# EAGLE board bc-cloony (EAGLE 7.7.0)
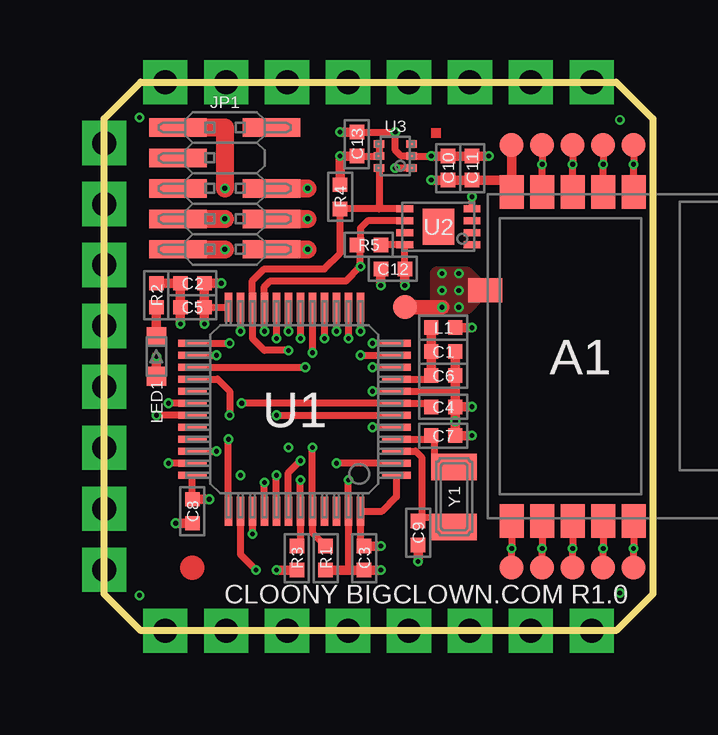
[diagram p0: board, top side]
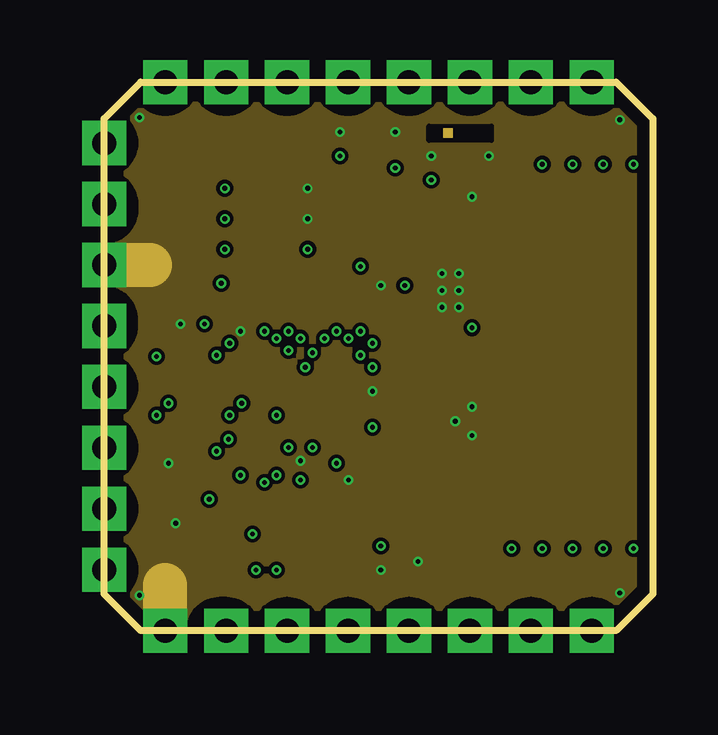
[diagram p1: board, inner layer Route2]
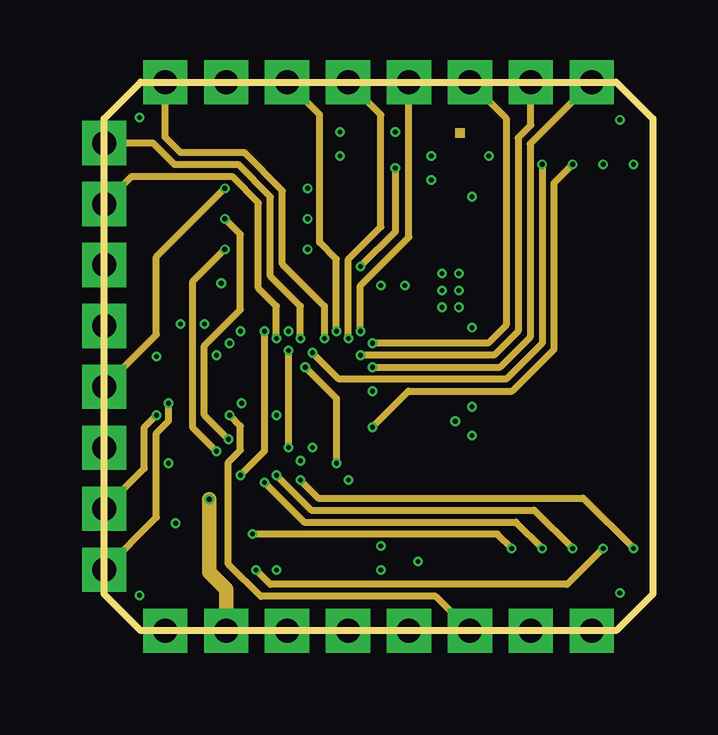
[diagram p2: board, inner layer Route3]
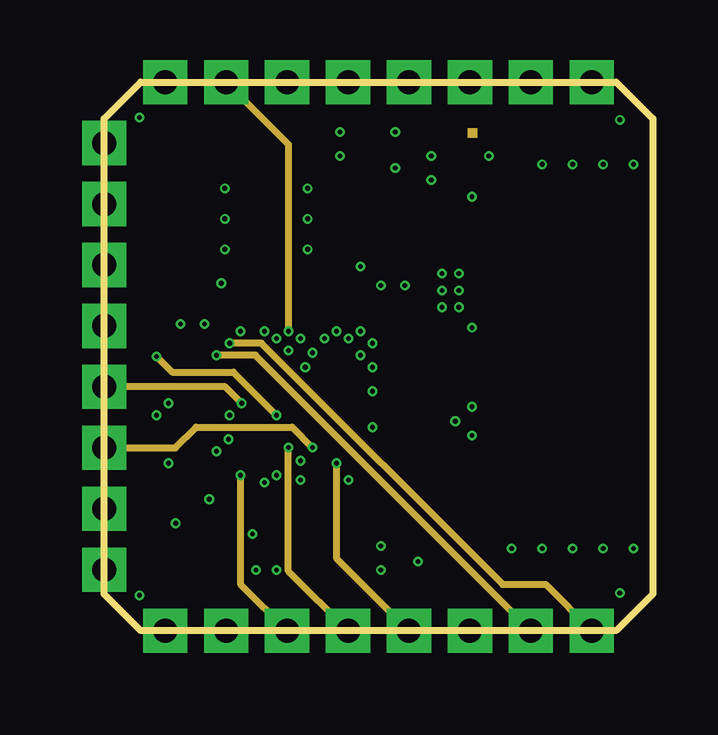
[diagram p3: board, inner layer Route14]
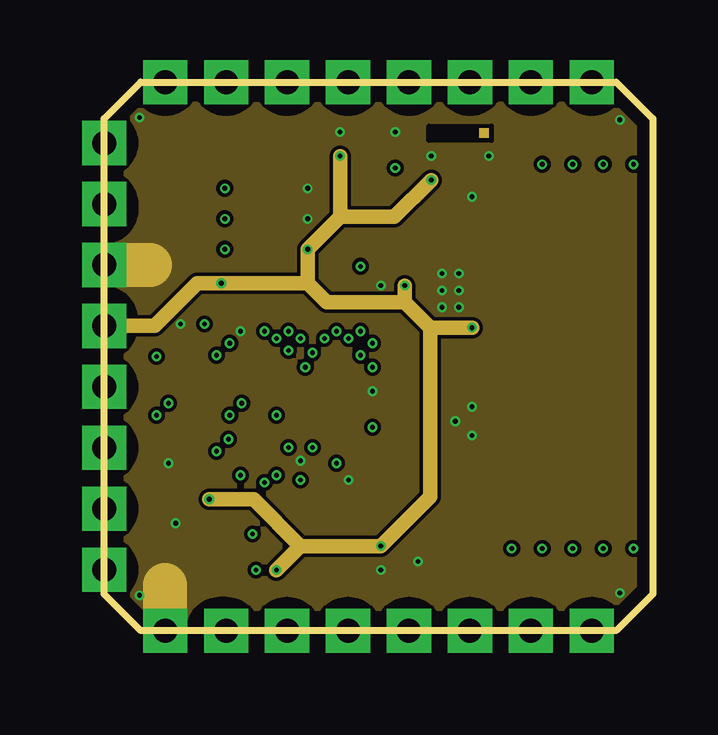
[diagram p4: board, inner layer Route15]

Size 22.86 x 22.86 mm. Coordinates in mm from the lower left corner, seen from the top.
Outline: 1.52,22.86 21.34,22.86 22.86,21.34 22.86,1.52 21.34,0 1.52,0 0,1.52 0,21.34 1.52,22.86
Copper layers [15:(1+2*3+14*15+16)]: Top 0.018mm / dielectric 0.1312mm / Route2 0.035mm / dielectric 0.25mm / Route3 0.035mm / dielectric 0.1182mm / Route14 0.035mm / dielectric 0.25mm / Route15 0.035mm / dielectric 0.1312mm / Bottom 0.018mm
Design rules "default *": minimum track width 0.3mm, minimum drill 0.2mm, track to track 0.15mm, track to pad 0.15mm, pad to pad 0.15mm, via to via 0.15mm, smd to smd 0.1mm, copper to edge 0mil, drill to drill 0.2mm, minimum pad ring 0mil, minimum via ring 0mil, stop-mask expansion 0.05mm, vias tented up to drill 0.3mm, thermal gap 0.3mm

## Footprints (pad centres in the part's own frame; a part is rotated, then mirrored left to right if it is on the bottom)
SPSGRF_R = smd 1.4 x 1: 1 -6.85,0.33; 2 -6.85,-0.94; 3 -6.85,-2.21; 4 -6.85,-3.48; 5 -6.85,-4.75; 7 6.85,-4.75; 8 6.85,-3.48; 9 6.85,-2.21; 10 6.85,-0.94; 11 6.85,0.33 | smd 1 x 1.4: 6 -2.75,-5.85
CAPACITOR-0402_R = smd 0.6 x 0.6: 1 -0.5,0; 2 0.5,0
BCH-P-SMT-1.27MM-2X5-E07 = smd 2.4 x 0.76: 1 -1.95,2.54; 2 1.95,2.54; 3 -1.95,1.27; 4 1.95,1.27; 5 -1.95,0; 6 1.95,0; 8 1.95,-1.27; 9 -1.95,-2.54; 10 1.95,-2.54
BC-HEADER-PIN-SQUARE-THT = drill 1 pad 1.84 square: 0 0,0
INDUCTOR-0402_R = smd 0.6 x 0.6: 1 -0.5,0; 2 0.5,0
KPT-1608LSURCK_R = smd 0.8 x 0.8: A -0.825,0; C 0.825,0
RESISTOR-0402_R = smd 0.6 x 0.6: 1 -0.5,0; 2 0.5,0
TP-1.0-MM = smd 1 x 1: 0 0,0
STM32L083CZT6_R = smd 1.2 x 0.3: 1 -4.25,2.75; 2 -4.25,2.25; 3 -4.25,1.75; 4 -4.25,1.25; 5 -4.25,0.75; 6 -4.25,0.25; 7 -4.25,-0.25; 8 -4.25,-0.75; 9 -4.25,-1.25; 10 -4.25,-1.75; 11 -4.25,-2.25; 12 -4.25,-2.75; 25 4.25,-2.75; 26 4.25,-2.25; 27 4.25,-1.75; 28 4.25,-1.25; 29 4.25,-0.75; 30 4.25,-0.25; 31 4.25,0.25; 32 4.25,0.75; 33 4.25,1.25; 34 4.25,1.75; 35 4.25,2.25; 36 4.25,2.75 | smd 0.3 x 1.2: 13 -2.75,-4.25; 14 -2.25,-4.25; 15 -1.75,-4.25; 16 -1.25,-4.25; 17 -0.75,-4.25; 18 -0.25,-4.25; 19 0.25,-4.25; 20 0.75,-4.25; 21 1.25,-4.25; 22 1.75,-4.25; 23 2.25,-4.25; 24 2.75,-4.25; 37 2.75,4.25; 38 2.25,4.25; 39 1.75,4.25; 40 1.25,4.25; 41 0.75,4.25; 42 0.25,4.25; 43 -0.25,4.25; 44 -0.75,4.25; 45 -1.25,4.25; 46 -1.75,4.25; 47 -2.25,4.25; 48 -2.75,4.25
ATSHA204A-MAHDA_R = smd 1.3 x 1.5: 0 0,0 | smd 0.7 x 0.3: 1 -1.4,0.75; 2 -1.4,0.25; 3 -1.4,-0.25; 4 -1.4,-0.75; 5 1.4,-0.75; 6 1.4,-0.25; 7 1.4,0.25; 8 1.4,0.75
TMP112AID_R = smd 0.45 x 0.3: 1 -0.675,0.5; 2 -0.675,0; 3 -0.675,-0.5; 4 0.675,-0.5; 5 0.675,0; 6 0.675,0.5
ABS07-32.768KHZ_R = smd 1.1 x 1.9: 1 -1.25,0; 2 1.25,0

## Placement (x,y rotation side)
A1  SPSGRF-868  [SPSGRF_R]  21.73,11.43 270 top
C1  1uF/10V  [CAPACITOR-0402_R]  14.13,11.63 0 top
C2  1uF/10V  [CAPACITOR-0402_R]  3.68,14.48 180 top
C3  100nF  [CAPACITOR-0402_R]  10.83,3.03 270 top
C4  100nF  [CAPACITOR-0402_R]  14.13,9.33 0 top
C5  100nF  [CAPACITOR-0402_R]  3.68,13.48 180 top
C6  100nF  [CAPACITOR-0402_R]  14.13,10.63 0 top
C7  18pF  [CAPACITOR-0402_R]  14.13,8.13 0 top
C8  100nF  [CAPACITOR-0402_R]  3.68,4.98 270 top
C9  18pF  [CAPACITOR-0402_R]  13.08,4.08 270 top
C10  4.7uF/10V  [CAPACITOR-0402_R]  14.33,19.28 90 top
C11  100nF  [CAPACITOR-0402_R]  15.33,19.28 90 top
C12  100nF  [CAPACITOR-0402_R]  12.03,15.08 180 top
C13  100nF  [CAPACITOR-0402_R]  10.53,20.28 90 top
FD1  FIDUCIAL  [FIDUCIAL-1MM]  3.68,2.63 0 top
FRAME1  FRAME-SCH/A4L-BRD/A4L  [FRAME-A4L]  11.43,11.43 0 top
JP1  BCH-P-SMT-1.27MM-2X5-E07  [BCH-P-SMT-1.27MM-2X5-E07]  5.03,18.43 180 top
JP2  BC-HEADER-PIN-SQUARE-THT  [BC-HEADER-PIN-SQUARE-THT]  20.32,22.86 0 top
JP3  BC-HEADER-PIN-SQUARE-THT  [BC-HEADER-PIN-SQUARE-THT]  17.78,22.86 0 top
JP4  BC-HEADER-PIN-SQUARE-THT  [BC-HEADER-PIN-SQUARE-THT]  15.24,22.86 0 top
JP5  BC-HEADER-PIN-SQUARE-THT  [BC-HEADER-PIN-SQUARE-THT]  12.7,22.86 0 top
JP6  BC-HEADER-PIN-SQUARE-THT  [BC-HEADER-PIN-SQUARE-THT]  10.16,22.86 0 top
JP7  BC-HEADER-PIN-SQUARE-THT  [BC-HEADER-PIN-SQUARE-THT]  7.62,22.86 0 top
JP8  BC-HEADER-PIN-SQUARE-THT  [BC-HEADER-PIN-SQUARE-THT]  5.08,22.86 0 top
JP9  BC-HEADER-PIN-SQUARE-THT  [BC-HEADER-PIN-SQUARE-THT]  2.54,22.86 0 top
JP10  BC-HEADER-PIN-SQUARE-THT  [BC-HEADER-PIN-SQUARE-THT]  0,20.32 0 top
JP11  BC-HEADER-PIN-SQUARE-THT  [BC-HEADER-PIN-SQUARE-THT]  0,17.78 0 top
JP12  BC-HEADER-PIN-SQUARE-THT  [BC-HEADER-PIN-SQUARE-THT]  0,15.24 0 top
JP13  BC-HEADER-PIN-SQUARE-THT  [BC-HEADER-PIN-SQUARE-THT]  0,12.7 0 top
JP14  BC-HEADER-PIN-SQUARE-THT  [BC-HEADER-PIN-SQUARE-THT]  0,10.16 0 top
JP15  BC-HEADER-PIN-SQUARE-THT  [BC-HEADER-PIN-SQUARE-THT]  0,7.62 0 top
JP16  BC-HEADER-PIN-SQUARE-THT  [BC-HEADER-PIN-SQUARE-THT]  0,5.08 0 top
JP17  BC-HEADER-PIN-SQUARE-THT  [BC-HEADER-PIN-SQUARE-THT]  0,2.54 0 top
JP18  BC-HEADER-PIN-SQUARE-THT  [BC-HEADER-PIN-SQUARE-THT]  20.32,0 0 top
JP19  BC-HEADER-PIN-SQUARE-THT  [BC-HEADER-PIN-SQUARE-THT]  17.78,0 0 top
JP20  BC-HEADER-PIN-SQUARE-THT  [BC-HEADER-PIN-SQUARE-THT]  15.24,0 0 top
JP21  BC-HEADER-PIN-SQUARE-THT  [BC-HEADER-PIN-SQUARE-THT]  12.7,0 0 top
JP22  BC-HEADER-PIN-SQUARE-THT  [BC-HEADER-PIN-SQUARE-THT]  10.16,0 0 top
JP23  BC-HEADER-PIN-SQUARE-THT  [BC-HEADER-PIN-SQUARE-THT]  7.62,0 0 top
JP24  BC-HEADER-PIN-SQUARE-THT  [BC-HEADER-PIN-SQUARE-THT]  5.08,0 0 top
JP25  BC-HEADER-PIN-SQUARE-THT  [BC-HEADER-PIN-SQUARE-THT]  2.54,0 0 top
L1  BLM15HD182SN1D  [INDUCTOR-0402_R]  14.13,12.63 0 top
LED1  KPT-1608LSURCK  [KPT-1608LSURCK_R]  2.18,11.43 90 top
R1  10k  [RESISTOR-0402_R]  9.23,3.03 90 top
R2  1k2  [RESISTOR-0402_R]  2.18,13.98 90 top
R3  1M  [RESISTOR-0402_R]  8.03,3.03 270 top
R4  10k  [RESISTOR-0402_R]  9.83,18.08 90 top
R5  10k  [RESISTOR-0402_R]  11.03,16.08 0 top
TP1  TP-1.0-MM  [TP-1.0-MM]  16.98,20.23 0 top
TP2  TP-1.0-MM  [TP-1.0-MM]  12.53,13.48 0 top
TP19  TP-1.0-MM  [TP-1.0-MM]  20.79,20.23 0 top
TP20  TP-1.0-MM  [TP-1.0-MM]  22.06,20.23 0 top
TP21  TP-1.0-MM  [TP-1.0-MM]  22.06,2.63 0 top
TP22  TP-1.0-MM  [TP-1.0-MM]  20.79,2.63 0 top
TP23  TP-1.0-MM  [TP-1.0-MM]  16.98,2.63 0 top
TP24  TP-1.0-MM  [TP-1.0-MM]  18.25,2.63 0 top
TP25  TP-1.0-MM  [TP-1.0-MM]  19.52,2.63 0 top
TP26  TP-1.0-MM  [TP-1.0-MM]  18.25,20.23 0 top
TP27  TP-1.0-MM  [TP-1.0-MM]  19.52,20.23 0 top
U1  STM32L083CZT6  [STM32L083CZT6_R]  7.93,9.23 180 top
U2  ATSHA204A-MAHDA  [ATSHA204A-MAHDA_R]  13.93,16.83 180 top
U3  TMP112AID  [TMP112AID_R]  12.13,19.78 180 top
Y1  ABS07-32.768KHZ  [ABS07-32.768KHZ_R]  14.58,5.58 90 top

## Library data of the parts
A1 = bc-radio; BCPN: BC-A-SPSGRF-868
C1 C2 = bc-capacitor; BCPN: BC-C-0402-1UF-10V
C3-C6 C8 C11-C13 = bc-capacitor; BCPN: BC-C-0402-100NF
C7 C9 = bc-capacitor; BCPN: BC-C-0402-18PF
C10 = bc-capacitor; BCPN: BC-C-0402-4.7UF-10V
FD1 = bc-fiducial; BCPN: -
FRAME1 = bc-frame; BCPN: -; PROJECT_NAME: CLOONY; PROJECT_REVISION: 1.0
JP1 = bc-header; BCPN: BC-JP-BCH-P-SMT-1.27MM-2X5-E07
JP2-JP25 = bc-header; BCPN: -
L1 = bc-inductor; BCPN: BC-L-BLM15HD182SN1D
LED1 = bc-led; BCPN: BC-LED-KPT-1608LSURCK
R1 R4 R5 = bc-resistor; BCPN: BC-R-0402-10K
R2 = bc-resistor; BCPN: BC-R-0402-1K2
R3 = bc-resistor; BCPN: BC-R-0402-1M
TP1 TP2 TP19-TP27 = bc-testpoint; BCPN: -
U1 = bc-microcontroller; BCPN: BC-U-STM32L083CZT6
U2 = bc-memory; BCPN: BC-U-ATSHA204A-MAHDA
U3 = bc-sensor; BCPN: BC-U-TMP112AID
Y1 = bc-crystal; BCPN: BC-Y-ABS07-32.768KHZ

## Nets
BOOT: JP15.0 R1.2 U1.44
CATHODE: LED1.C R2.1
DEBUG_SWCLK: JP1.4 U1.37
DEBUG_SWDIO: JP1.2 U1.34
GND: A1.6 C1.2 C2.2 C3.2 C4.2 C5.2 C6.2 C7.2 C8.2 C9.2 C10.2 C11.2 C12.2 C13.2 JP1.3 JP1.5 JP12.0 JP25.0 R1.1 R2.2 TP2.0 U1.8 U1.23 U1.35 U1.42 U1.47 U2.4 U3.2
LED: LED1.A U1.6
OSC32_IN: C9.1 U1.3 Y1.1
OSC32_OUT: C7.1 U1.4 Y1.2
P0/A0/TXD0: JP2.0 U1.10
P1/A1/RXD0: JP3.0 U1.11
P2/A2/TXD1: JP4.0 U1.12
P3/A3/RXD1: JP5.0 U1.13
P4/A4/DAC0: JP6.0 U1.14
P5/A5/DAC1: JP7.0 U1.15
P6/RTS1: JP8.0 U1.19
P7/CTS1: JP9.0 U1.16
P8: JP10.0 U1.18
P9: JP11.0 U1.20
P10/RXD2: JP16.0 U1.31
P11/TXD2: JP17.0 U1.30
P12/MISO: JP21.0 U1.2 U1.27
P13/MOSI: JP20.0 U1.28
P14/SCLK: JP19.0 U1.26
P15/CS: JP18.0 U1.25
RADIO_CS: A1.10 TP22.0 U1.38
RADIO_GPIO0: A1.4 TP26.0 U1.17
RADIO_GPIO1: A1.3 TP27.0 U1.5
RADIO_GPIO2: A1.2 TP19.0
RADIO_GPIO3: A1.1 TP20.0
RADIO_MISO: A1.8 TP24.0 U1.40
RADIO_MOSI: A1.9 TP25.0 U1.41
RADIO_SCLK: A1.7 TP23.0 U1.39
RADIO_SDN: A1.11 R3.1 TP21.0 U1.43
RESET: C4.1 JP1.10 JP14.0 U1.7
SCL0: JP23.0 R5.1 U1.21 U2.6 U3.1
SDA0: JP22.0 R4.1 U1.22 U2.5 U3.6
VDD: A1.5 C2.1 C3.1 C5.1 C8.1 C10.1 C11.1 C12.1 C13.1 JP1.1 JP13.0 JP24.0 L1.2 R3.2 R4.2 R5.2 TP1.0 U1.1 U1.24 U1.36 U1.48 U2.8 U3.4 U3.5
VDDA: C1.1 C6.1 L1.1 U1.9

## Tracks (layer width: path | path; a pad name or v marks a point on that pad's centre or on a via)
BOOT  (via drill 0.2 pad 0.4)
  Top 0.3: R1.2 8.68,4.08 U1.44 v8.68,7.63
  Route14 0.3: JP15.0 2.97,7.62 3.83,8.48 7.83,8.48 v8.68,7.63
CATHODE
  Top 0.4: R2.1 LED1.C
DEBUG_SWCLK  (via drill 0.2 pad 0.4)
  Top 0.3: U1.37 v5.18,7.98
  Top 0.76: JP1.4 v5.03,17.16
  Route3 0.3: v5.03,17.16 5.68,16.51 5.68,13.38 4.18,11.88 4.18,8.98 v5.18,7.98
DEBUG_SWDIO  (via drill 0.2 pad 0.4)
  Top 0.3: U1.34 v4.68,7.48
  Top 0.76: JP1.2 v5.03,15.89
  Route3 0.3: v5.03,15.89 3.68,14.54 3.68,8.48 v4.68,7.48
GND  (via drill 0.2 pad 0.4)
  Top 0.3: 14.63,9.98 U1.8 v11.18,9.98 | 10.18,2.53 U1.47 v10.18,6.28 | U1.35 v2.68,6.98 | U2.4 v15.33,18.08 | U1.23 v5.68,12.48 | v13.63,19.78 U3.2 12.38,19.78 12.13,20.03 v12.13,20.78 C13.2 | U1.42 7.68,6.58 v8.18,7.08
  Top 0.4: C9.2 v13.08,2.88 | C1.2 C6.2 14.63,9.98 C4.2 | R1.1 10.18,2.53 C3.2 v11.53,2.53 | v15.33,8.13 C7.2 v14.63,8.73 C4.2 | C8.2 v2.98,4.48 | v3.18,12.78 C5.2 C2.2 R2.2 | C13.2 v9.83,20.78 | C12.2 v11.53,14.38 | v13.63,19.78 C10.2 C11.2 v16.03,19.78 | C4.2 v15.33,9.33
  Top 0.6: TP2.0 v14.08,13.48
  Top 0.76: JP1.3 v8.48,17.16 | JP1.5 v8.48,18.43
  Route2 1.84: JP12.0 1.9,15.24 | JP25.0 2.54,1.9
  Route15 1.84: JP25.0 2.54,1.9 | JP12.0 1.9,15.24
  other vias: 14.78,14.88 14.78,13.48 14.78,14.18 14.08,14.88 14.08,14.18 21.49,1.57 21.49,21.29 1.47,21.39 1.47,1.47
  pour Top (no thermals): 13.88,14.88 15.08,14.88 15.53,14.43 15.53,13.93 15.08,13.48 13.88,13.48
  pour Route15 (no thermals): 0.45,22.41 0.45,0.45 22.06,0.45 22.06,22.41
  pour Route2 (no thermals): 0.45,22.41 0.45,0.45 22.06,0.45 22.06,22.41
LED  (via drill 0.2 pad 0.4)
  Top 0.3: v7.18,8.98 U1.6
  Top 0.4: v2.18,11.43 LED1.A
  Route14 0.3: v2.18,11.43 2.83,10.78 5.38,10.78 v7.18,8.98
N$1
  cutout Route2: 13.53,21.03 16.13,21.03 16.13,20.43 13.53,20.43
N$2
  cutout Route15: 13.53,21.03 16.13,21.03 16.13,20.43 13.53,20.43
N$3
  cutout Route15: 0,21.59 arc-90 1.27,20.32 arc-90 0,19.05 arc-90 -1.27,20.32 arc-90
  cutout Route15: 0,11.43 arc-90 1.27,10.16 arc-90 0,8.89 arc-90 -1.27,10.16 arc-90
  cutout Route15: 0,8.89 arc-90 1.27,7.62 arc-90 0,6.35 arc-90 -1.27,7.62 arc-90
  cutout Route15: 0,6.35 arc-90 1.27,5.08 arc-90 0,3.81 arc-90 -1.27,5.08 arc-90
  cutout Route15: 0,3.81 arc-90 1.27,2.54 arc-90 0,1.27 arc-90 -1.27,2.54 arc-90
  cutout Route15: 5.08,1.27 arc-90 6.35,0 arc-90 5.08,-1.27 4.83,-1.27 arc-90 3.56,0 arc-90 4.83,1.27
  cutout Route15: 7.62,1.27 arc-90 8.89,0 arc-90 7.62,-1.27 arc-90 6.35,0 arc-90
  cutout Route15: 10.16,1.27 arc-90 11.43,0 arc-90 10.16,-1.27 arc-90 8.89,0 arc-90
  cutout Route15: 12.7,1.27 arc-90 13.97,0 arc-90 12.7,-1.27 arc-90 11.43,0 arc-90
  cutout Route15: 15.24,1.27 arc-90 16.51,0 arc-90 15.24,-1.27 arc-90 13.97,0 arc-90
  cutout Route15: 17.78,1.27 arc-90 19.05,0 arc-90 17.78,-1.27 arc-90 16.51,0 arc-90
  cutout Route15: 20.32,1.27 arc-90 21.59,0 arc-90 20.32,-1.27 arc-90 19.05,0 arc-90
  cutout Route15: 20.32,24.13 arc-90 21.59,22.86 arc-90 20.32,21.59 arc-90 19.05,22.86 arc-90
  cutout Route15: 17.78,24.13 arc-90 19.05,22.86 arc-90 17.78,21.59 arc-90 16.51,22.86 arc-90
  cutout Route15: 15.24,24.13 arc-90 16.51,22.86 arc-90 15.24,21.59 arc-90 13.97,22.86 arc-90
  cutout Route15: 12.7,24.13 arc-90 13.97,22.86 arc-90 12.7,21.59 arc-90 11.43,22.86 arc-90
  cutout Route15: 10.16,24.13 arc-90 11.43,22.86 arc-90 10.16,21.59 arc-90 8.89,22.86 arc-90
  cutout Route15: 7.62,24.13 arc-90 8.89,22.86 arc-90 7.62,21.59 arc-90 6.35,22.86 arc-90
  cutout Route15: 5.08,24.13 arc-90 6.35,22.86 arc-90 5.08,21.59 arc-90 3.81,22.86 arc-90
  cutout Route15: 2.54,24.13 arc-90 3.81,22.86 arc-90 2.54,21.59 arc-90 1.27,22.86 arc-90
  cutout Route2: 2.54,24.13 arc-90 3.81,22.86 arc-90 2.54,21.59 arc-90 1.27,22.86 arc-90
  cutout Route2: 5.08,24.13 arc-90 6.35,22.86 arc-90 5.08,21.59 arc-90 3.81,22.86 arc-90
  cutout Route2: 7.62,24.13 arc-90 8.89,22.86 arc-90 7.62,21.59 arc-90 6.35,22.86 arc-90
  cutout Route2: 10.16,24.13 arc-90 11.43,22.86 arc-90 10.16,21.59 arc-90 8.89,22.86 arc-90
  cutout Route2: 12.7,24.13 arc-90 13.97,22.86 arc-90 12.7,21.59 arc-90 11.43,22.86 arc-90
  cutout Route2: 15.24,24.13 arc-90 16.51,22.86 arc-90 15.24,21.59 arc-90 13.97,22.86 arc-90
  cutout Route2: 17.78,24.13 arc-90 19.05,22.86 arc-90 17.78,21.59 arc-90 16.51,22.86 arc-90
  cutout Route2: 20.32,24.13 arc-90 21.59,22.86 arc-90 20.32,21.59 arc-90 19.05,22.86 arc-90
  cutout Route2: 0,21.59 arc-90 1.27,20.32 arc-90 0,19.05 arc-90 -1.27,20.32 arc-90
  cutout Route2: 0,11.43 arc-90 1.27,10.16 arc-90 0,8.89 arc-90 -1.27,10.16 arc-90
  cutout Route2: 0,8.89 arc-90 1.27,7.62 arc-90 0,6.35 arc-90 -1.27,7.62 arc-90
  cutout Route2: 0,6.35 arc-90 1.27,5.08 arc-90 0,3.81 arc-90 -1.27,5.08 arc-90
  cutout Route2: 0,3.81 arc-90 1.27,2.54 arc-90 0,1.27 arc-90 -1.27,2.54 arc-90
  cutout Route2: 7.62,1.27 arc-90 8.89,0 arc-90 7.62,-1.27 arc-90 6.35,0 arc-90
  cutout Route2: 10.16,1.27 arc-90 11.43,0 arc-90 10.16,-1.27 arc-90 8.89,0 arc-90
  cutout Route2: 12.7,1.27 arc-90 13.97,0 arc-90 12.7,-1.27 arc-90 11.43,0 arc-90
  cutout Route2: 15.24,1.27 arc-90 16.51,0 arc-90 15.24,-1.27 arc-90 13.97,0 arc-90
  cutout Route2: 17.78,1.27 arc-90 19.05,0 arc-90 17.78,-1.27 arc-90 16.51,0 arc-90
  cutout Route2: 20.32,1.27 arc-90 21.59,0 arc-90 20.32,-1.27 arc-90 19.05,0 arc-90
  cutout Route15: 0.76,1.52 2.29,0 0.76,0
  cutout Route15: 22.86,20.57 21.34,22.1 22.86,22.1
  cutout Route15: 1.52,22.1 0.76,21.34 0.76,22.1
  cutout Route15: 21.34,0.76 22.86,2.29 22.86,0.76
  cutout Route15: 1.27,17.53 arc-90 0,16.26 arc-90 -1.27,17.53 -1.27,17.78 arc-90 0,19.05 arc-90 1.27,17.78
  cutout Route15: 1.27,12.95 arc90 0,14.22 arc90 -1.27,12.95 -1.27,12.7 arc90 0,11.43 arc90 1.27,12.7
  cutout Route2: 5.08,1.27 arc-90 6.35,0 arc-90 5.08,-1.27 4.83,-1.27 arc-90 3.56,0 arc-90 4.83,1.27
  cutout Route2: 1.27,12.95 arc90 0,14.22 arc90 -1.27,12.95 -1.27,12.7 arc90 0,11.43 arc90 1.27,12.7
  cutout Route2: 1.27,17.53 arc-90 0,16.26 arc-90 -1.27,17.53 -1.27,17.78 arc-90 0,19.05 arc-90 1.27,17.78
  cutout Route2: 0.76,1.52 2.29,0 0.76,0
  cutout Route2: 21.34,0.76 22.86,2.29 22.86,0.76
  cutout Route2: 22.86,20.57 21.34,22.1 22.86,22.1
  cutout Route2: 1.52,22.1 0.76,21.34 0.76,22.1
OSC32_IN
  Top 0.3: U1.3 12.98,7.48 13.23,7.23 13.23,4.58 C9.1 13.08,4.73 14.58,4.73 Y1.1
OSC32_OUT
  Top 0.3: U1.4 13.63,7.98 C7.1 13.78,8.13 13.78,6.83 Y1.2
P0/A0/TXD0  (via drill 0.2 pad 0.4)
  Top 0.3: U1.10 v11.18,10.98
  Route3 0.3: v11.18,10.98 16.5,10.98 17.75,12.23 17.75,20.29 JP2.0
P1/A1/RXD0  (via drill 0.2 pad 0.4)
  Top 0.3: v10.68,11.48 U1.11
  Route3 0.3: v10.68,11.48 16.25,11.48 17.25,12.48 17.25,20.54 17.78,21.07 JP3.0
P2/A2/TXD1  (via drill 0.2 pad 0.4)
  Top 0.3: U1.12 v11.18,11.98
  Route3 0.3: v11.18,11.98 16,11.98 16.75,12.73 16.75,21.35 JP4.0
P3/A3/RXD1  (via drill 0.2 pad 0.4)
  Top 0.3: U1.13 v10.68,12.48
  Route3 0.3: v10.68,12.48 10.68,14.38 12.7,16.4 JP5.0
P4/A4/DAC0  (via drill 0.2 pad 0.4)
  Top 0.3: U1.14 v10.18,12.18
  Route3 0.3: v10.18,12.18 10.18,15.48 11.53,16.83 11.53,21.49 JP6.0
P5/A5/DAC1  (via drill 0.2 pad 0.4)
  Top 0.3: U1.15 v9.68,12.48
  Route3 0.3: v9.68,12.48 9.68,15.48 8.98,16.18 8.98,21.5 JP7.0
P6/RTS1  (via drill 0.2 pad 0.4)
  Top 0.3: v7.68,12.48 U1.19
  Route14 0.3: v7.68,12.48 7.68,20.26 JP8.0
P7/CTS1  (via drill 0.2 pad 0.4)
  Top 0.3: U1.16 v9.18,12.18
  Route3 0.3: v9.18,12.18 9.18,13.53 7.43,15.28 7.43,18.33 5.83,19.93 3.18,19.93 2.54,20.57 JP9.0
P8  (via drill 0.2 pad 0.4)
  Top 0.3: U1.18 v8.18,12.18
  Route3 0.3: v8.18,12.18 8.18,13.53 6.93,14.78 6.93,18.08 5.58,19.43 2.93,19.43 2.04,20.32 JP10.0
P9  (via drill 0.2 pad 0.4)
  Top 0.3: U1.20 v7.18,12.18
  Route3 0.3: v7.18,12.18 7.18,13.53 6.43,14.28 6.43,17.83 5.33,18.93 1.15,18.93 JP11.0
P10/RXD2  (via drill 0.2 pad 0.4)
  Top 0.3: U1.31 v2.18,8.98
  Route3 0.3: v2.18,8.98 1.68,8.48 1.68,6.76 JP16.0
P11/TXD2  (via drill 0.2 pad 0.4)
  Top 0.3: U1.30 v2.68,9.48
  Route3 0.3: v2.68,9.48 2.68,8.73 2.18,8.23 2.18,4.72 JP17.0
P12/MISO  (via drill 0.2 pad 0.4)
  Top 0.3: U1.27 v8.38,10.98 | U1.2 v9.68,6.98
  Route3 0.3: v8.38,10.98 9.68,9.68 v9.68,6.98
  Route14 0.3: v9.68,6.98 9.68,3.02 JP21.0
P13/MOSI  (via drill 0.2 pad 0.4)
  Top 0.3: U1.28 4.73,10.48 5.23,9.98 v5.23,8.98
  Route3 0.3: v5.23,8.98 5.68,8.53 5.68,7.53 5.18,7.03 5.18,2.78 6.53,1.43 13.81,1.43 JP20.0
P14/SCLK  (via drill 0.2 pad 0.4)
  Top 0.3: U1.26 v4.68,11.48
  Route14 0.3: v4.68,11.48 6.3,11.48 JP19.0
P15/CS  (via drill 0.2 pad 0.4)
  Top 0.3: U1.25 v5.23,11.98
  Route14 0.3: JP18.0 18.39,1.93 16.6,1.93 6.55,11.98 v5.23,11.98
RADIO_CS  (via drill 0.2 pad 0.4)
  Top 0.3: A1.10 v20.79,3.43 TP22.0 | U1.38 5.68,3.18 v6.33,2.53
  Route3 0.3: v6.33,2.53 6.93,1.93 19.29,1.93 v20.79,3.43
RADIO_GPIO0  (via drill 0.2 pad 0.4)
  Top 0.3: A1.4 v18.25,19.43 TP26.0 | U1.17 v8.68,11.58
  Route3 0.3: v18.25,19.43 18.25,11.98 16.75,10.48 9.78,10.48 v8.68,11.58
RADIO_GPIO1  (via drill 0.2 pad 0.4)
  Top 0.3: U1.5 v11.18,8.48 | A1.3 v19.52,19.43 TP27.0
  Route3 0.3: v11.18,8.48 12.68,9.98 17,9.98 18.75,11.73 18.75,18.66 v19.52,19.43
RADIO_GPIO2  (via drill 0.2 pad 0.4)
  Top 0.3: A1.2 v20.79,19.43 TP19.0
RADIO_GPIO3  (via drill 0.2 pad 0.4)
  Top 0.3: A1.1 v22.06,19.43 TP20.0
RADIO_MISO  (via drill 0.2 pad 0.4)
  Top 0.3: A1.8 v18.25,3.43 TP24.0 | U1.40 v6.68,6.18
  Route3 0.3: v6.68,6.18 8.33,4.53 17.15,4.53 v18.25,3.43
RADIO_MOSI  (via drill 0.2 pad 0.4)
  Top 0.3: A1.9 v19.52,3.43 TP25.0 | U1.41 v7.18,6.48
  Route3 0.3: v7.18,6.48 8.63,5.03 17.92,5.03 v19.52,3.43
RADIO_SCLK  (via drill 0.2 pad 0.4)
  Top 0.3: A1.7 v16.98,3.43 TP23.0 | U1.39 v6.18,4.03
  Route3 0.3: v16.98,3.43 16.38,4.03 v6.18,4.03
RADIO_SDN  (via drill 0.2 pad 0.4)
  Top 0.3: A1.11 v22.06,3.43 TP21.0 | R3.1 8.18,3.53 U1.43 v8.18,6.28
  Route3 0.3: v8.18,6.28 8.93,5.53 19.96,5.53 v22.06,3.43
RESET  (via drill 0.2 pad 0.4)
  Top 0.3: C4.1 13.63,9.48 U1.7 v5.73,9.48
  Top 0.76: JP1.10 5.03,20.97 v5.03,18.43
  Route3 0.3: v5.03,18.43 2.18,15.58 2.18,12.34 JP14.0
  Route14 0.3: JP14.0 5.05,10.16 v5.73,9.48
SCL0  (via drill 0.2 pad 0.4)
  Top 0.3: U2.6 10.98,17.08 10.68,16.78 10.68,16.08 | U3.1 v12.13,19.28 | v6.68,12.48 U1.21 6.68,14.33 6.93,14.58 10.08,14.58 v10.68,15.18 10.68,16.08 | 10.68,16.08 R5.1
  Route3 0.3: v6.68,12.48 6.68,7.48 v5.68,6.48 | v12.13,19.28 12.13,16.63 v10.68,15.18
  Route14 0.3: v5.68,6.48 5.68,1.94 JP23.0
SDA0  (via drill 0.2 pad 0.4)
  Top 0.3: U2.5 11.46,17.58 | 11.46,17.58 R4.1 9.83,15.73 9.18,15.08 6.68,15.08 6.18,14.58 U1.22 6.18,12.18 6.68,11.68 v7.68,11.68 | U3.6 11.46,17.58
  Route3 0.3: v7.68,11.68 v7.68,7.63
  Route14 0.3: v7.68,7.63 7.68,2.48 JP22.0
VDD  (via drill 0.2 pad 0.4)
  Top 0.3: C3.1 10.68,3.68 U1.48 11.58,4.98 12.18,5.58 U1.1 | C8.1 U1.36 | R5.2 U2.8 C12.1 | C5.1 U1.24 | C13.1 U3.5 U3.4
  Top 0.4: C3.1 v11.53,3.53 | R3.2 v7.18,2.53 | C8.1 v4.38,5.48 | v4.18,12.78 C5.1 C2.1 v4.88,14.48 | C12.1 v12.53,14.38 | C13.1 v9.83,19.78 R4.2 | L1.2 v15.33,12.63 | 16.98,18.78 C11.1 C10.1 v13.63,18.78 | 16.98,18.78 A1.5 | TP1.0 16.98,18.78
  Top 0.76: JP1.1 v8.48,15.89
  Route3 0.6: v4.38,5.48 4.38,2.43 5.08,1.73 JP24.0
  Route15 0.6: v7.18,2.53 8.18,3.53 | 8.18,3.53 v11.53,3.53 13.58,5.58 13.58,12.63 | v4.38,5.48 6.23,5.48 8.18,3.53 | v12.53,14.38 12.53,13.68 | 12.53,13.68 13.58,12.63 | 13.58,12.63 v15.33,12.63 | 8.48,14.48 v4.88,14.48 3.88,14.48 2.1,12.7 JP13.0 | 8.48,14.48 v8.48,15.89 9.83,17.24 | 12.53,13.68 9.28,13.68 8.48,14.48 | 9.83,17.24 v9.83,19.78 | 9.83,17.24 12.09,17.24 v13.63,18.78
VDDA
  Top 0.3: U1.9 13.63,10.48 C6.1
  Top 0.4: C6.1 C1.1 L1.1
(copper drawn outside any net)
  shapes: Route14 area x1, Route15 area x1, Route2 area x1, Route3 area x1, Top area x1

## Text on the board
tPlace: CLOONY BIGCLOWN.COM R1.0
Document: CLOONY (c) by BigClown Labs s.r.o. | CLOONY is licensed under the | CERN Open Hardware Licence version 1.2. | You should have received a copy of the licence along with this | work. If not, see <http://www.ohwr.org/cernohl>.